# Altium PCB pcb.PcbDoc
Units mil, origin at the board's own origin, x right, y up, seen from the top; angles counter-clockwise.
Board outline 2558.74 x 2204.72 mil, 2 copper layers (Top Layer, Bottom Layer), stack 61.2 mil thick; 11 components, 11 nets, 70 pads, 0 vias.
Unrouted connection lines stored in the file: 26.
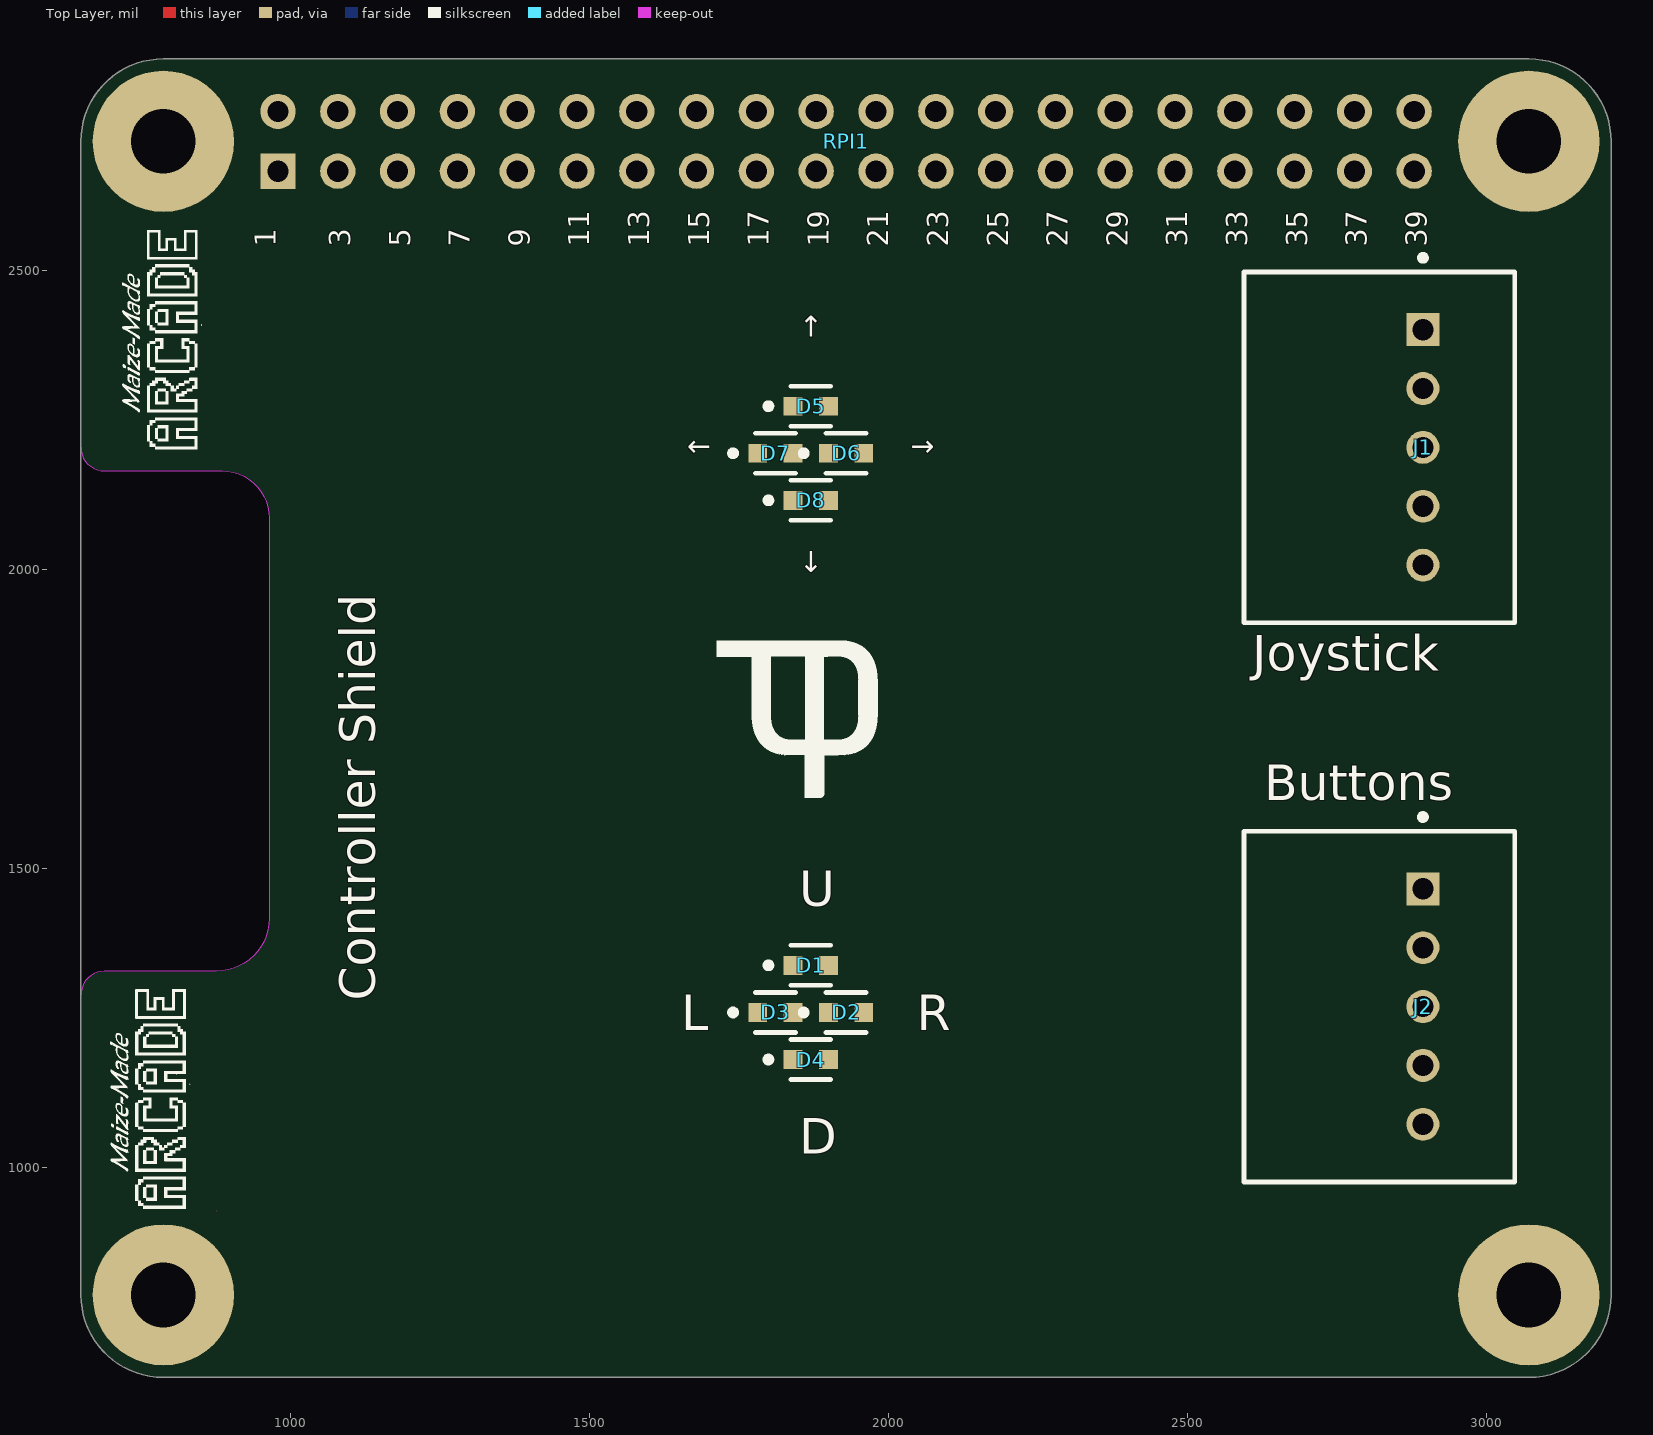
[diagram p0: Top Layer view]
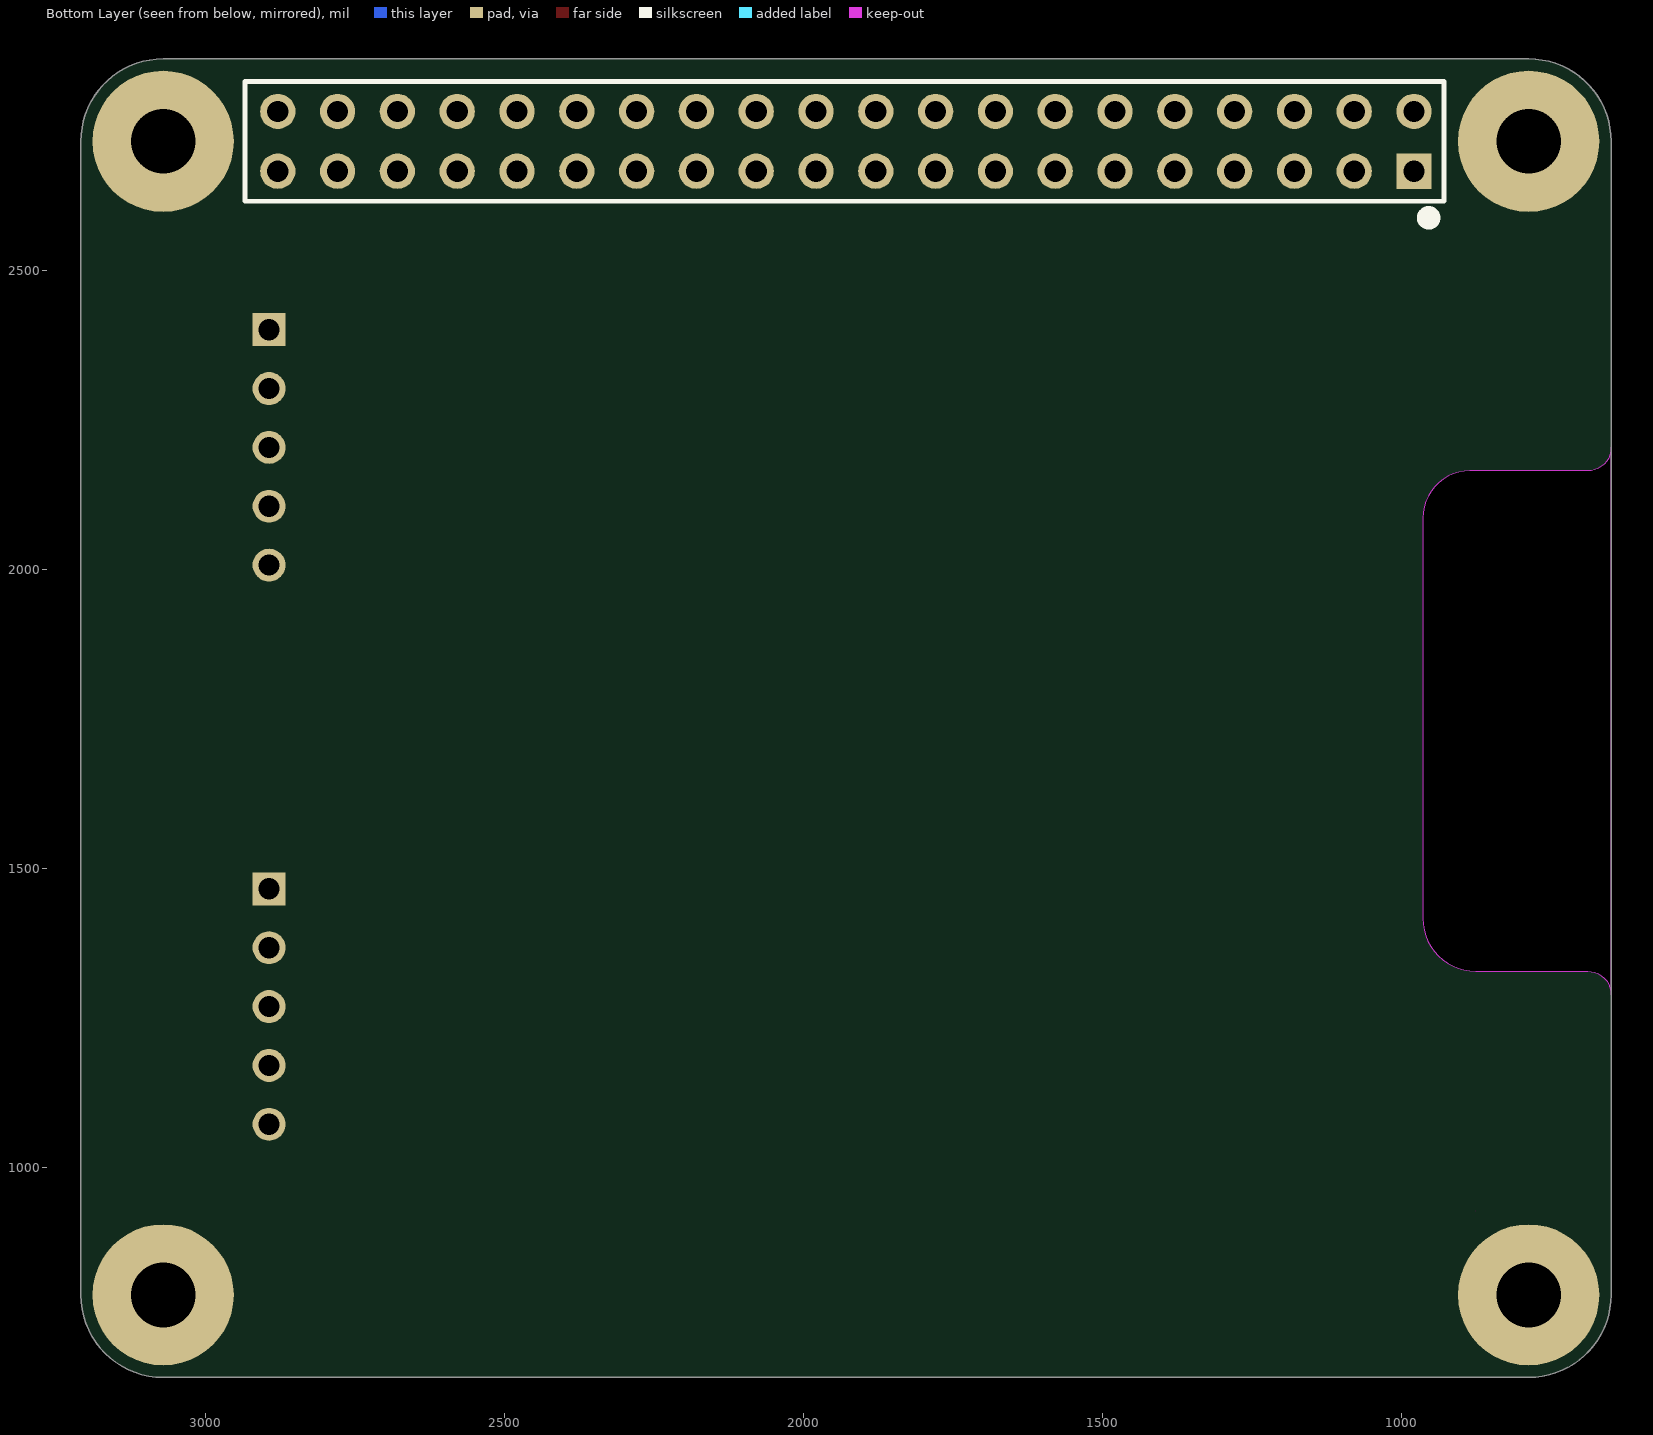
[diagram p1: Bottom Layer view, seen from below]

## Layer stack, top to bottom
Top Solder: solder mask 0.8, Solder Resist, Dk 3.5
Top Layer: signal copper 2.1
Dielectric 1: dielectric 57, FR-4, Dk 4.6
Bottom Layer: signal copper 2.1
Bottom Solder: solder mask 0.8, Solder Resist, Dk 3.5

## Board outline
649.61,787.4 ccw(c787.4,787.4) 787.4,649.61 3070.87,649.61 ccw(c3070.71,787.24) 3208.35,787.4 3208.35,2716.54 ccw(c3070.71,2716.69) 3070.87,2854.33 787.4,2854.33 ccw(c787.4,2716.54) 649.61,2716.54
cut-out: 649.61,1289.37 649.61,2204.72 ccw(c688.98,2204.72) 688.98,2165.35 885.83,2165.35 cw(c885.83,2086.61) 964.57,2086.61 964.57,1417.32 cw(c875.99,1417.32) 875.98,1328.74 688.98,1328.74 ccw(c688.97,1289.37)

## Design rules (kind name [scope] priority, off if disabled: settings)
Clearance [All] p1: gap=10 ignorepadtopadclearanceinfootprint=FALSE except(0: Arc-Hole Track-Hole SMDPad-Hole THPad-Hole Via-Hole Fill-Hole Poly-Hole Region-Hole Text-Hole)
PolygonConnect [All] p1: connectstyle=Relief reliefconductorwidth=10 reliefentries=4 polygonreliefangle="90 Angle" airgapwidth=10
RoomDefinition schematic [InComponentClass('schematic')] p1: confinementstyle=ConfineIn formatcopy=TRUE lockcomponents=FALSE outline 3248.03,708.66 3740.15,708.66 3740.15,1456.69 3248.03,1456.69
RoutingVias [All] p1: holewidth=28 width=50 viastyle="Through Hole" minholewidth=28 minwidth=50 maxholewidth=28 maxwidth=50
SolderMaskExpansion [All] p1: expansion=4 istentingtop=FALSE
Width [All] p1: maxlimit=10 minlimit=10 preferedwidth=10
30 further rules are at their usual default settings.

## Components (designator, comment, footprint, x,y, rotation, side; value= is the part's Value field where it differs from the comment)
D1 "LTST-C190GKT" FP-LTST-C190GKT-MFG 1870.08,1338.58 r0 top
D2 "LTST-C190GKT" FP-LTST-C190GKT-MFG 1929.13,1259.84 r0 top
D3 "LTST-C190GKT" FP-LTST-C190GKT-MFG 1811.02,1259.84 r0 top
D4 "LTST-C190GKT" FP-LTST-C190GKT-MFG 1870.08,1181.1 r0 top
D5 "LTST-C190GKT" FP-LTST-C190GKT-MFG 1870.08,2273.62 r0 top
D6 "LTST-C190GKT" FP-LTST-C190GKT-MFG 1929.13,2194.88 r0 top
D7 "LTST-C190GKT" FP-LTST-C190GKT-MFG 1811.02,2194.88 r0 top
D8 "LTST-C190GKT" FP-LTST-C190GKT-MFG 1870.08,2116.14 r0 top
J1 "S5B-XH-A-1(LF)(SN)" FP-S5B-XH-A-1_LF_SN-MFG 2820.87,2204.72 r90 top
J2 "S5B-XH-A-1(LF)(SN)" FP-S5B-XH-A-1_LF_SN-MFG 2820.87,1269.68 r90 top
RPI1 "RPI GPIO Connector" RPI 1929.13,2716.54 r180 top

## Footprints (in the part's own frame and the unit in brackets; to place one, negate y for a bottom-side part, rotate by r counter-clockwise, add the part's x,y. Pads: shape width x height; smd on the part's side, far side on the other; paste and mask are expansions set on the pad)
FP-LTST-C190GKT-MFG [mm]
  rect 0.8x0.8 smd paste+0 mask+0: 1(-0.75,0) 2(0.75,0)
  silkscreen extent -1.92,-0.85 0.85,0.85, body extent -1.25,-0.55 1.25,0.55, height 0.25
FP-S5B-XH-A-1_LF_SN-MFG [mm]
  rect 1.4x1.4 hole 0.9 paste-1000 mask+0: 1(5,-1.85)
  round 1.4 hole 0.9 paste-1000 mask+0: 2(2.5,-1.85) 3(0,-1.85) 4(-2.5,-1.85) 5(-5,-1.85)
  silkscreen extent -7.45,-5.75 8.17,5.75, body extent -7.55,-5.85 7.55,5.85, height 0.25
RPI [mm]
  rect 1.5x1.5 hole 0.9: 1(24.13,1.27)
  round 1.5 hole 0.9: 2(24.13,-1.27) 3(21.59,1.27) 4(21.59,-1.27) 5(19.05,1.27) 6(19.05,-1.27) 7(16.51,1.27) 8(16.51,-1.27) 9(13.97,1.27) 10(13.97,-1.27) 11(11.43,1.27) 12(11.43,-1.27) 13(8.89,1.27) 14(8.89,-1.27) 15(6.35,1.27) 16(6.35,-1.27) 17(3.81,1.27) 18(3.81,-1.27) 19(1.27,1.27) 20(1.27,-1.27) 21(-1.27,1.27) 22(-1.27,-1.27) 23(-3.81,1.27) 24(-3.81,-1.27) 25(-6.35,1.27) 26(-6.35,-1.27) 27(-8.89,1.27) 28(-8.89,-1.27) 29(-11.43,1.27) 30(-11.43,-1.27) 31(-13.97,1.27) 32(-13.97,-1.27) 33(-16.51,1.27) 34(-16.51,-1.27) 35(-19.05,1.27) 36(-19.05,-1.27) 37(-21.59,1.27) 38(-21.59,-1.27) 39(-24.13,1.27) 40(-24.13,-1.27)
  body extent -25.52,-2.63 25.53,2.38, height 8.5

## Part data
D1 D2 D3 D4 D5 D6 D7 D8: library part CMP-22017-000005-2, "LED GREEN CLEAR CHIP SMD", Case Code (Imperial)=0603, Case Code (Metric)=1608, Color=Green, Forward Current=30mA, Forward Voltage=2.1V, Lens Color=Colorless, Manufacturer="Vishay Lite-On", Max Operating Temperature=85°C, Min Operating Temperature=-55°C, Package Quantity=1, Power Dissipation=100mW, Reverse Voltage=5V, Supplier Part Number 1=160-1183-1-ND, Test Current=10mA, Voltage=2V, Case/Package=0603, Category=LEDs, Channels=1, Color@wavelength=Green, ComponentLink1Description=https://datasheet.ciiva.com:443/pdfs/VipMasterIC/IC/LITE/LITES10869/LITES10869-1.pdf?src-supplier=IHS+Markit, ComponentLink1URL=https://datasheet.ciiva.com:443/pdfs/VipMasterIC/IC/LITE/LITES10869/LITES10869-1.pdf?src-supplier=IHS+Markit, ComponentLink2Description=https://datasheet.ciiva.com/2109/ltst-c190gkt-2109985.pdf?src-supplier=Digi-Key, ComponentLink2URL=https://datasheet.ciiva.com/2109/ltst-c190gkt-2109985.pdf?src-supplier=Digi-Key, ComponentLink3Description=https://datasheet.ciiva.com/12403/lite-on-ltst-c190gkt-187204-12403884.pdf?src-supplier=Mouser, ComponentLink3URL=https://datasheet.ciiva.com/12403/lite-on-ltst-c190gkt-187204-12403884.pdf?src-supplier=Mouser, ComponentLink4Description=https://datasheet.ciiva.com/16392/lite-on20ltst-c190gkt-16392818.pdf?src-supplier=Future+Electronics, ComponentLink4URL=https://datasheet.ciiva.com/16392/lite-on20ltst-c190gkt-16392818.pdf?src-supplier=Future+Electronics, ComponentLink5Description=https://datasheet.ciiva.com/11775/0900766b80dc02a6-11775616.pdf?src-supplier=Rs, ComponentLink5URL=https://datasheet.ciiva.com/11775/0900766b80dc02a6-11775616.pdf?src-supplier=Rs, ComponentLink6Description=https://datasheet.ciiva.com/2109/ltst-c190gkt-2109986.pdf?src-supplier=Digi-Key, ComponentLink6URL=https://datasheet.ciiva.com/2109/ltst-c190gkt-2109986.pdf?src-supplier=Digi-Key, ComponentLink7Description=https://datasheet.ciiva.com/2109/ltst-c190gkt-2109987.pdf?src-supplier=Digi-Key, ComponentLink7URL=https://datasheet.ciiva.com/2109/ltst-c190gkt-2109987.pdf?src-supplier=Digi-Key, Depth=0.8mm, Dominant Wavelength=569nm, Height=0.8mm, Illumination Color=Green, JESD-609 Code=e3, Lead Free="Lead Free", Length=1.6mm, Lens Style=Clear, Lens Transparency=Clear, Luminous Intensity=6mcd, Luminous Intensity-Nom=6mcd, Manufacturer Part Number=LTST-C190GKT, Mount="Surface Mount", Mounting Technology="Surface Mount", Number of Elements=1, Number of LEDs=1, Number of Pins=2, Optoelectronic Device Type="SINGLE COLOR LED", Overall Height=0.8mm, Packaging="Tape and Reel", Pins=2, Power Rating=100mW, Pricing 1="1=0.24, 10=0.132, 100=0.0611, 500=0.0564, 1000=0.04418, 2000=0.04324 (USD)", Radiation Hardening=No, Reach SVHC Compliant=Yes, Reverse Voltage-Max=5V, RoHS=Yes, RoHS Compliant=Yes, Shape=Rectangular, Size=1.1mm, Stock 1=271465, Supplier 1=Digi-Key, Terminal Finish=Tin, Terminal Pitch=1.5mm, Viewing Angle=130°, Wavelength=565nm, Width=0.8mm
J1 J2: library part CMP-17439-000362-1, "CONN HEADER R/A 5POS 2.5MM", Flammability Rating="UL94 V-0", Insulation Color=Natural, Manufacturer=JST, Max Operating Temperature=85°C, Min Operating Temperature=-25°C, Supplier Part Number 1=455-4228-ND, Voltage Rating=250V, Category="Headers and Wire Housings", ComponentLink1Description=https://datasheet.ciiva.com/16484/s5b-xh-a-1lfsn-16484586.pdf?src-supplier=Future+Electronics, ComponentLink1URL=https://datasheet.ciiva.com/16484/s5b-xh-a-1lfsn-16484586.pdf?src-supplier=Future+Electronics, Connector Type=Header, Contact Finish - Mating=TIN, Contact Material=Brass, Contact Shape=Square, Contact Type="Male Pin", Fastening Type=Detent, Insulation Material=Nylon, Lead Free="Lead Free", Manufacturer Part Number=S5B-XH-A-1(LF)(SN), Mount="Through Hole", Number of Positions=5, Number of Rows=1, Packaging=Bulk, Pitch=2.5mm, Pricing 1="1=0.34, 10=0.289, 100=0.2245, 500=0.1924, 1000=0.16033, 5000=0.13742, 10000=0.12826 (USD)", RoHS=Yes, Series=XH, Stock 1=1175, Supplier 1=Digi-Key, Termination=Press-Fit
RPI1: library part "rpi connector", "GPIO Header for Raspberry Pi A+/B+/Pi 2/Pi 3 - 2x20", Manufacturer="SparkFun Electronics", Manufacturer Part Number=PRT-14017, Supplier Part Number 1=1568-1462-ND, Accessory Type=Connector, Category="Development Boards, Kits, Programmers", ComponentLink1Description=https://cdn.sparkfun.com/datasheets/Dev/RaspberryPi/12313.pdf, ComponentLink1URL=https://cdn.sparkfun.com/datasheets/Dev/RaspberryPi/12313.pdf, For Use With/Related Products="Raspberry Pi", Nils Minor=author, nilsminor@web.de=mail, Part Status=Active, Pricing 1="1=1.84 (EUR)", RoHS="RoHS Compliant", Stock 1=150, Supplier 1=Digi-Key

## Free pads (board coordinates)
  round 236.22 hole 108.27: ""(787.4,787.4) ""(787.4,2716.54) ""(3070.87,787.4) ""(3070.87,2716.54)

## Nets (pads, with @x,y where several pads share a name; then routed paths per layer and width w, separated by ;. In a path a pad name is that pad's centre, name@x,y a point inside that pad or via, vN(x,y) a via of type N, cw(c..) or ccw(c..) an arc to the next point about the centre after c; other vN are vias at no path point)
NetD1_1: D1.1 D2.1 D3.1 D4.1 RPI1.9
NetD1_2: D1.2 J2.2 RPI1.23
NetD2_2: D2.2 J2.3 RPI1.21
NetD3_2: D3.2 J2.4 RPI1.19
NetD4_2: D4.2 J2.5 RPI1.15
NetD5_1: D5.1 D6.1 D7.1 D8.1 J1.1 RPI1.39
NetD5_2: D5.2 J1.2 RPI1.37
NetD6_2: D6.2 J1.3 RPI1.35
NetD7_2: D7.2 J1.4 RPI1.33
NetD8_2: D8.2 J1.5 RPI1.31
NetJ2_1: J2.1 RPI1.25
pads on no net: RPI1.1 RPI1.2 RPI1.3 RPI1.4 RPI1.5 RPI1.6 RPI1.7 RPI1.8 RPI1.10 RPI1.11 RPI1.12 RPI1.13 RPI1.14 RPI1.16 RPI1.17 RPI1.18 RPI1.20 RPI1.22 RPI1.24 RPI1.26 RPI1.27 RPI1.28 RPI1.29 RPI1.30 RPI1.32 RPI1.34 RPI1.36 RPI1.38 RPI1.40

## Other copper
Top Layer:
  region: 876.34,927.8 876.34,927.89 876.43,927.89 876.43,927.8 876.53,927.8 876.53,927.71 876.34,927.71
  region: 896.03,2197.49 896.03,2197.58 896.12,2197.58 896.12,2197.49 896.21,2197.49 896.21,2197.4 896.03,2197.4

## Silkscreen, mask and mechanical layers (free items; w line width, h text height)
Top Overlay:
  drawing of 103 lines, arcs and shapes, not listed
  text "1" at 975,2540.16 h35 r90
  text "3" at 1100,2540.16 h35 r90
  text "5" at 1200,2540.16 h35 r90
  text "7" at 1300,2540.16 h35 r90
  text "9" at 1400,2540.16 h35 r90
  text "11" at 1500,2540.16 h35 r90
  text "13" at 1600,2540.16 h35 r90
  text "15" at 1700,2540.16 h35 r90
  text "17" at 1800,2540.16 h35 r90
  text "19" at 1900,2540.16 h35 r90
  text "21" at 2000,2540.16 h35 r90
  text "23" at 2100,2540.16 h35 r90
  text "25" at 2200,2540.16 h35 r90
  text "27" at 2300,2540.16 h35 r90
  text "29" at 2400,2540.16 h35 r90
  text "31" at 2500,2540.16 h35 r90
  text "33" at 2600,2540.16 h35 r90
  text "35" at 2700,2540.16 h35 r90
  text "37" at 2800,2540.16 h35 r90
  text "39" at 2900,2540.16 h35 r90
  text "↑" at 1850.39,2377.71 h60
  text "←" at 1663.39,2178.42 h60
  text "→" at 2037.4,2178.42 h60
  text "↓" at 1850.39,1984.06 h60
  text "Joystick" at 2608.43,1831.17 h60
  text "Buttons" at 2628.11,1614.33 h60
  text "U" at 1850.55,1437.17 h60
  text "Controller Shield" at 1141.57,1279.68 h60 r90
  text "L" at 1653.7,1230.47 h60
  text "R" at 2047.4,1230.47 h60
  text "D" at 1850.55,1023.78 h60
Bottom Overlay:
  circle w19.68: c954.72,2588.58 r9.84
M2: Outline:
  the board outline again, w10